# EAGLE board Light Module (EAGLE 5.10)
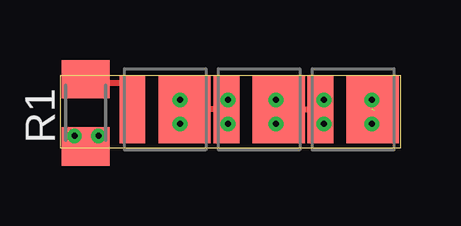
[diagram p0: board, top side]
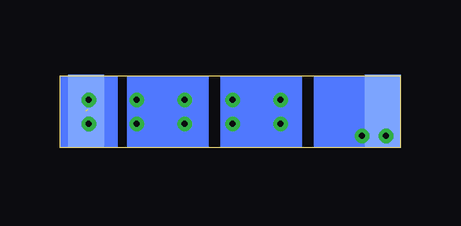
[diagram p1: board, bottom side, seen from below]

Size 14.2 x 3 mm. Coordinates in mm from the lower left corner, seen from the top.
Outline: 0,0 14.2,0 14.2,3 0,3 0,0
Copper layers (1*16): Top 0.0356mm / dielectric 1.5011mm / Bottom 0.0356mm
Design rules "LaenPCBOrder": minimum track width 6mil, minimum drill 13mil, track to track 6mil, track to pad 6mil, pad to pad 6mil, via to via 6mil, smd to smd 6mil, copper to edge 15mil, drill to drill 6mil, minimum pad ring 7mil, minimum via ring 7mil, stop-mask expansion 4mil, vias tented up to drill 0mil, thermal gap 10mil

## Footprints (pad centres in the part's own frame; a part is rotated, then mirrored left to right if it is on the bottom)
3535L = smd 2.8 x 1.07: ANODE 0,1.365 | smd 2.8 x 2.18: CATHODE 0,-0.81
M1206 = smd 1.6 x 2: 1 -1.4,0; 2 1.4,0
SMD_TERM = smd 3 x 1.5: P$1 0,0

## Placement (x,y rotation side)
D1  PHILIPS_LUMILEDSTANDARD  [3535L]  4.38,1.6 90 top
D2  PHILIPS_LUMILEDSTANDARD  [3535L]  8.3,1.6 90 top
D3  PHILIPS_LUMILEDSTANDARD  [3535L]  12.22,1.6 90 top
R1  [M1206]  1.06,1.46 90 top
U$1  TERMINALSMD  [SMD_TERM]  0.74,1.54 90 bottom
U$2  TERMINALSMD  [SMD_TERM]  13.11,1.55 270 bottom

## Library data of the parts
D1-D3 U$1 U$2 = walthour
R1 = resistor

## Nets
N$1: R1.1 U$1.P$1
N$2: D1.ANODE R1.2
N$3: D1.CATHODE D2.ANODE
N$4: D2.CATHODE D3.ANODE
N$5: D3.CATHODE U$2.P$1

## Tracks (layer width: path | path; a pad name or v marks a point on that pad's centre or on a via)
N$1  (via drill 0.25)
  Top 0.254: v0.6,0.5 1.06,0.5 R1.1
  Bottom 0.254: U$1.P$1 0.6,1.54 v0.6,0.5
N$2
  Top 0.254: D1.ANODE 3.02,1.99 3,2 2.9,2 2.9,2.7 1.06,2.7 R1.2
N$3
  Top 0.254: D2.ANODE D1.CATHODE
N$4
  Top 0.254: D2.CATHODE D3.ANODE
N$5  (1 unrouted)
N$6  (via drill 0.25)
  other vias: 1.6,0.5
N$8  (via drill 0.25)
  other vias: 5,2
N$9  (via drill 0.25)
  other vias: 5,1
N$10  (via drill 0.25)
  other vias: 7,1
N$11  (via drill 0.25)
  other vias: 7,2
N$12  (via drill 0.25)
  other vias: 9,2
N$13  (via drill 0.25)
  other vias: 9,1
N$14  (via drill 0.25)
  other vias: 11,1
N$15  (via drill 0.25)
  other vias: 11,2
N$16  (via drill 0.25)
  other vias: 13,2
N$17  (via drill 0.25)
  other vias: 13,1
(copper drawn outside any net)
  shapes: Bottom area x4